# EAGLE board PIR (EAGLE 9.7.0)
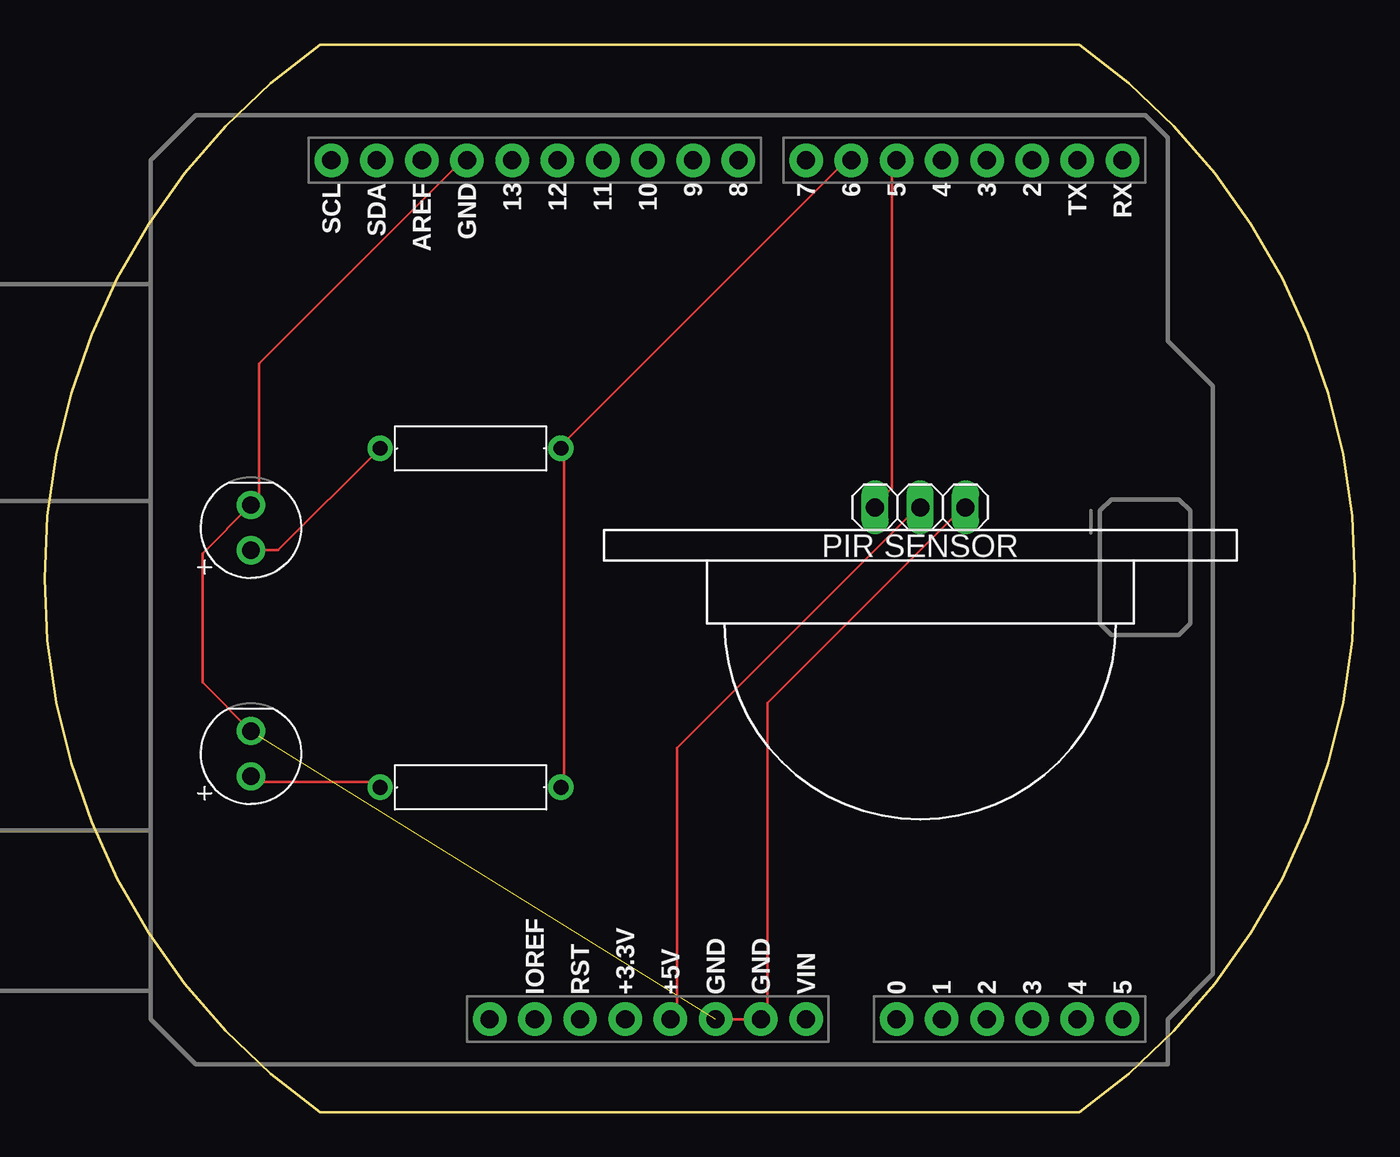
[diagram p0: board, top side]
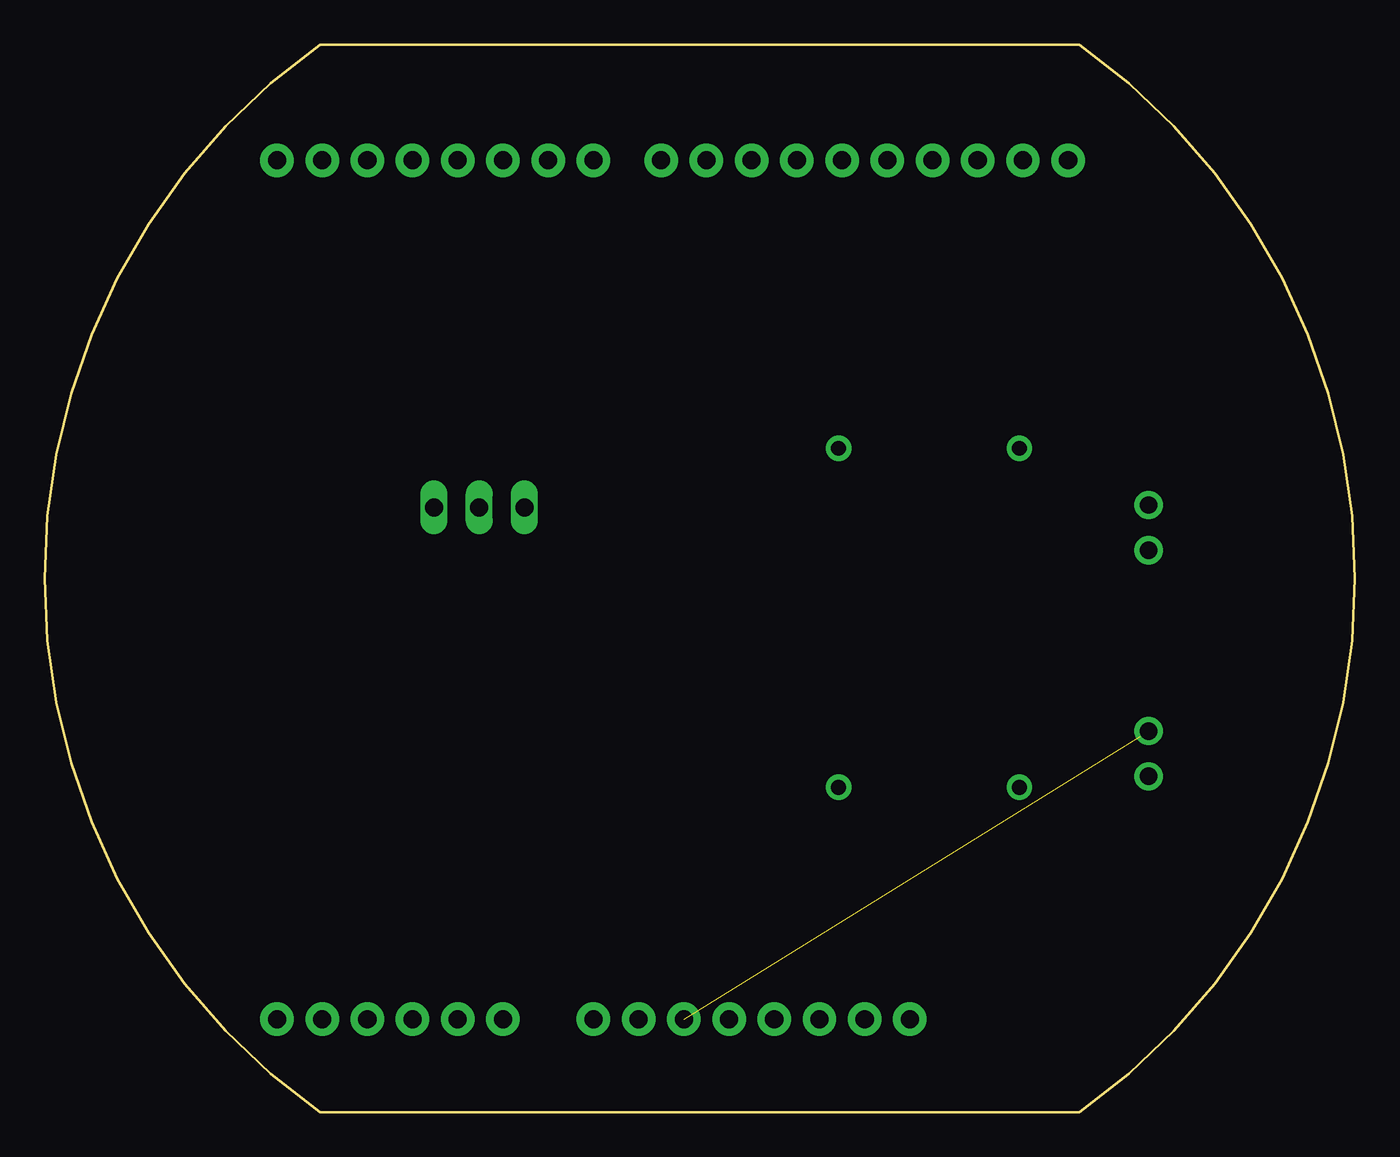
[diagram p1: board, bottom side, seen from below]

Size 73.63 x 60 mm. Coordinates in mm from the lower left corner, seen from the top.
Outline: 15.48,60 arc109 15.48,0 58.16,0 arc109 58.16,60 15.48,60
Copper layers (1*16): Top 0.035mm / dielectric 1.5mm / Bottom 0.035mm
Design rules "default": minimum track width 6mil, minimum drill 0.35mm, track to track 6mil, track to pad 6mil, pad to pad 6mil, via to via 6mil, smd to smd 6mil, copper to edge 40mil, drill to drill 6mil, minimum pad ring 10mil, minimum via ring 8mil, stop-mask expansion 4mil, vias tented up to drill 0mil, thermal gap 10mil

## Footprints (pad centres in the part's own frame; a part is rotated, then mirrored left to right if it is on the bottom)
LEDRD254W60D565H860B = drill 0.981 pad 1.581: 1 -1.27,0; 2 1.27,0
LEDRD254W60D565H860B_B = drill 0.981 pad 1.581: 1 -1.27,0; 2 1.27,0
28027 = drill 1.016 long: 1 -2.54,0; 2 0,0; 3 2.54,0
RESAD1016W63L850D250B = drill 0.83 pad 1.43: 1 -5.08,0; 2 5.08,0
ARDUINO-UNO-R3-SHIELD = drill 1.016 pad 1.88: 3.3V 24.13,-2.54; 5V 24.13,0; A0 24.13,12.7; A1 24.13,15.24; A2 24.13,17.78; A3 24.13,20.32; A4 24.13,22.86; A5 24.13,25.4; AREF -24.13,-13.97; D2 -24.13,20.32; D3 -24.13,17.78; D4 -24.13,15.24; D5 -24.13,12.7; D6 -24.13,10.16; D7 -24.13,7.62; D8 -24.13,3.81; D9 -24.13,1.27; D10 -24.13,-1.27; D11 -24.13,-3.81; D12 -24.13,-6.35; D13 -24.13,-8.89; GND@0 24.13,2.54; GND@1 24.13,5.08; GND@2 -24.13,-11.43; IOREF 24.13,-7.62; NC 24.13,-10.16; RES 24.13,-5.08; RX -24.13,25.4; SCL -24.13,-19.05; SDA -24.13,-16.51; TX -24.13,22.86; VIN 24.13,7.62

## Placement (x,y rotation side)
D1  RED  [LEDRD254W60D565H860B]  11.6,32.85 90 top
D2  BLUE  [LEDRD254W60D565H860B_B]  11.6,20.15 90 top
PIR1  PIR-SENSOR_28027  [28027]  49.2,33.99 0 top
R1  220  [RESAD1016W63L850D250B]  23.94,18.26 180 top
R2  220  [RESAD1016W63L850D250B]  23.94,37.31 180 top
U1  ARDUINO-UNO-R3-SHIELD  [ARDUINO-UNO-R3-SHIELD]  35.17,29.36 270 top

## Library data of the parts
D1 = Tinkercad; CATEGORY: Opto-Electronic; SUB-CATEGORY: LED; VALUE: LED_RED
D2 = Tinkercad; CATEGORY: Opto-Electronic; SUB-CATEGORY: LED; VALUE: LED_BLUE
PIR1 R1 R2 U1 = Tinkercad

## Nets
D1_A: D1.1 R2.2
D2_A: D2.1 R1.2
U1_5V: PIR1.2 U1.5V
U1_D5: PIR1.1 U1.D5
U1_D6: R1.1 R2.1 U1.D6
U1_GND: D1.2 D2.2 PIR1.3 U1.GND@0 U1.GND@1 U1.GND@2

## Tracks (layer width: path | path; a pad name or v marks a point on that pad's centre or on a via)
D1_A
  Top 0.152: D1.1 13.13,31.58 R2.2
D2_A
  Top 0.152: R1.2 18.4,18.57 12.05,18.57 D2.1
U1_5V
  Top 0.152: PIR1.2 48.88,33.81 35.55,20.48 35.55,5.23 U1.5V
U1_D5
  Top 0.152: PIR1.1 46.98,34.45 47.61,35.08 47.61,53.5 U1.D5
U1_D6
  Top 0.152: R1.1 29.2,18.57 29.2,36.98 R2.1 29.2,37.62 45.07,53.5 U1.D6
U1_GND  (1 unrouted)
  Top 0.152: PIR1.3 51.42,33.81 40.63,23.02 40.63,5.23 U1.GND@1 U1.GND@0 | D2.2 8.88,24.14 8.88,31.4 D1.2 12.05,34.45 12.05,42.06 23.48,53.5 U1.GND@2
  Bottom 0.152: 12.05,21.11 D2.2